# Altium PCB Starboard Deployable Solar Panel.PcbDoc (part 2 of 2)
Units mm, origin at the board's own origin, x right, y up, seen from the top; angles counter-clockwise.
Board outline 327.5 x 81 mm, 2 copper layers (Top Layer, Bottom Layer), stack 1.58 mm thick; 54 components, 32 nets, 176 pads, 1774 vias.
Unrouted connection lines stored in the file: 37.
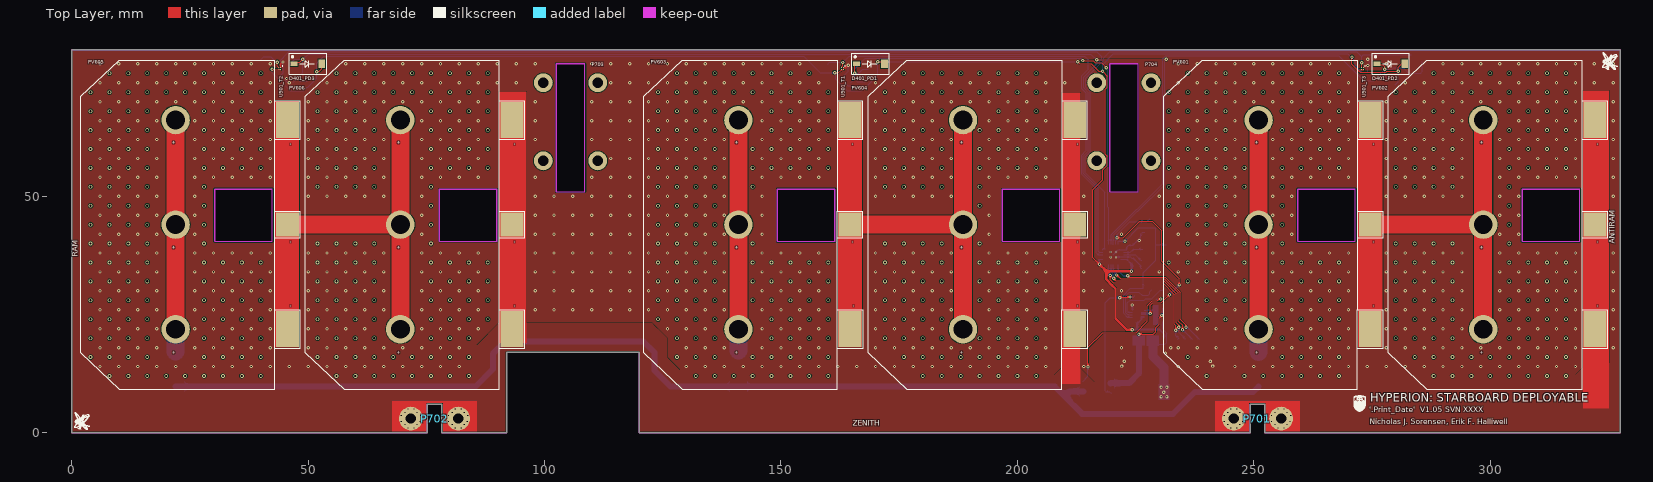
[diagram p0: Top Layer view]

## Silkscreen, mask and mechanical layers (free items; w line width, h text height) (continued)
Top Assembly: (continued)
  lines w0.254: 327.47,0 252.26,0 252.26,5.94 252.21,5.99 249.25,5.99 249.25,0.01 120,0.01 120,18 92,18 92,0.01 78.23,0.01 78.23,5.99 75.26,5.99 75.24,5.97 75.24,0 0,0 ; 0,0 0,81.008 327.5,80.998 327.5,-0.01 327.5,81.001 0,81.001 0,0 ; 102.5,51 102.5,78 108.5,78 108.5,51 102.5,51 ; 219.5,51 219.5,78 225.5,78 225.5,51 219.5,51

## Text inside footprints (layer, text, board x,y; h text height)
PV601: Top Overlay "+" at 250.365,17.33 h0.7 r270; Top Overlay "+" at 250.365,39.555 h0.7 r270; Top Overlay "+" at 250.365,61.78 h0.7 r270; Top Overlay "-" at 275.028,26.906 h0.7 r270; Top Overlay "-" at 275,40.444 h0.7 r270; Top Overlay "-" at 275,61.145 h0.7 r270
PV602: Top Overlay "+" at 297.865,17.33 h0.7 r270; Top Overlay "+" at 297.865,39.555 h0.7 r270; Top Overlay "+" at 297.865,61.78 h0.7 r270; Top Overlay "-" at 322.528,26.906 h0.7 r270; Top Overlay "-" at 322.5,40.444 h0.7 r270; Top Overlay "-" at 322.5,61.145 h0.7 r270
PV603: Top Overlay "+" at 140.365,17.33 h0.7 r270; Top Overlay "+" at 140.365,39.555 h0.7 r270; Top Overlay "+" at 140.365,61.78 h0.7 r270; Top Overlay "-" at 165.028,26.906 h0.7 r270; Top Overlay "-" at 165,40.444 h0.7 r270; Top Overlay "-" at 165,61.145 h0.7 r270
PV604: Top Overlay "+" at 187.865,17.33 h0.7 r270; Top Overlay "+" at 187.865,39.555 h0.7 r270; Top Overlay "+" at 187.865,61.78 h0.7 r270; Top Overlay "-" at 212.528,26.906 h0.7 r270; Top Overlay "-" at 212.5,40.444 h0.7 r270; Top Overlay "-" at 212.5,61.145 h0.7 r270
PV605: Top Overlay "+" at 21.365,17.33 h0.7 r270; Top Overlay "+" at 21.365,39.555 h0.7 r270; Top Overlay "+" at 21.365,61.78 h0.7 r270; Top Overlay "-" at 46.028,26.906 h0.7 r270; Top Overlay "-" at 46,40.444 h0.7 r270; Top Overlay "-" at 46,61.145 h0.7 r270
PV606: Top Overlay "+" at 68.865,17.33 h0.7 r270; Top Overlay "+" at 68.865,39.555 h0.7 r270; Top Overlay "+" at 68.865,61.78 h0.7 r270; Top Overlay "-" at 93.528,26.906 h0.7 r270; Top Overlay "-" at 93.5,40.444 h0.7 r270; Top Overlay "-" at 93.5,61.145 h0.7 r270